# Allegro board TEST.brd
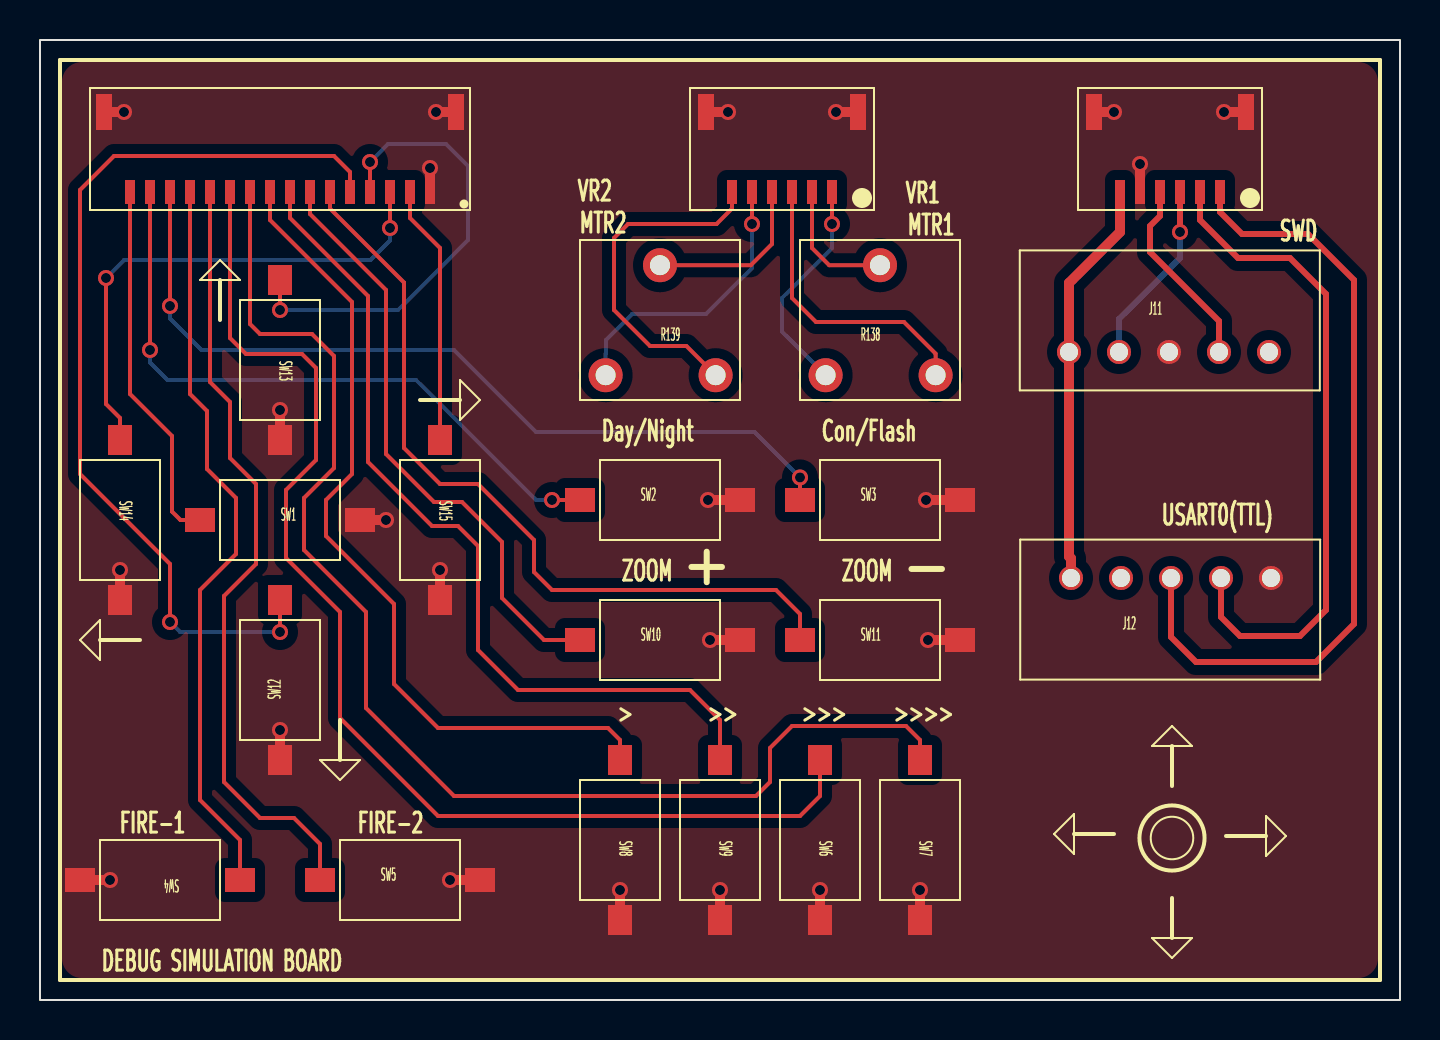
[diagram p0: board, top side]
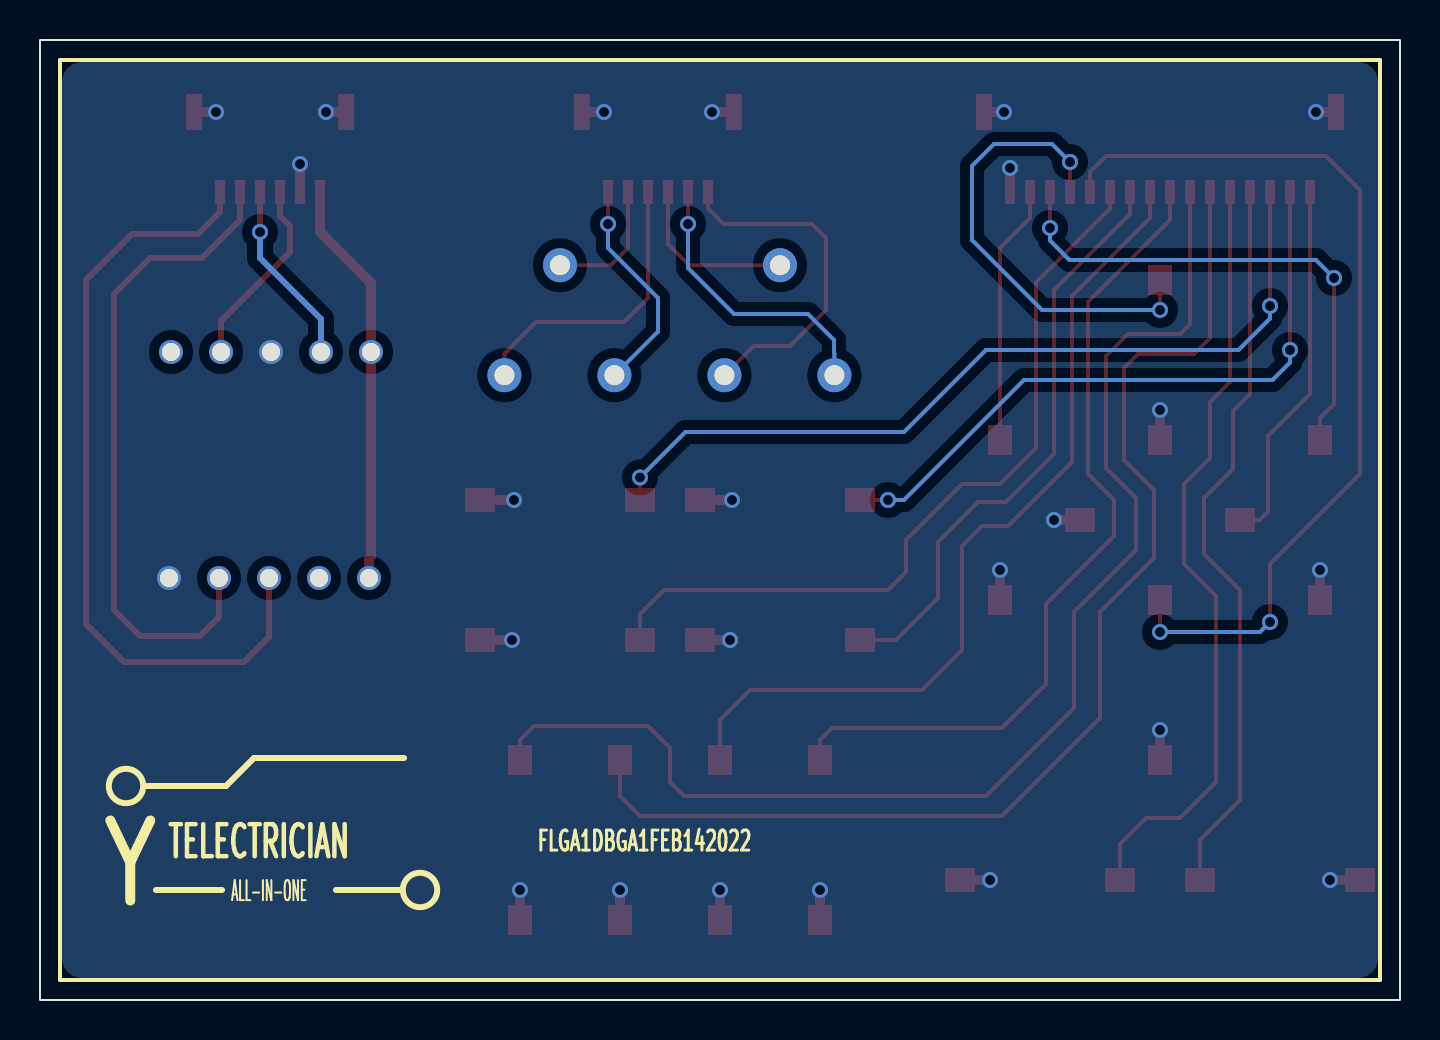
[diagram p1: board, bottom side, seen from below]

Outline 68 x 48 mm; copper layers: TOP, BOTTOM. Coordinates in mm from the lower left corner of the outline.
Outline path: rectangle 0,0 68,48

## Design rules (mm)
constraint set DEFAULT: min track width 0.127

## Placement (name value [footprint] x y rotation side)
J1  Header1x6  [SMD-SH1D0-6P-HOR]  37.1 41.1 180 top
J2  Header1x16  [SMD-SH1D0-16P-HOR]  12 41.1 180 top
J10  Header1x6  [SMD-SH1D0-6P-HOR]  56.5 41.1 180 top
J11  Header1x5  [XH2D54-5P-DEG90]  61.45 32.4 180 top
J12  Header1x5  [XH2D54-5P-DEG90]  51.55 21.1 0 top
NOREF  -  []  0 0 90 top
NOREF#2  -  []  0 48 0 top
R138  5K  [VR-BLUEWHITE]  42 34 0 top
R139  5K  [VR-BLUEWHITE]  31 34 0 top
SW1  Risym-SW  [RISYM-3X6X2D5]  12 24 0 top
SW2  Risym-SW  [RISYM-3X6X2D5]  31 25 0 top
SW3  Risym-SW  [RISYM-3X6X2D5]  42 25 0 top
SW4  Risym-SW  [RISYM-3X6X2D5]  6 6 180 top
SW5  Risym-SW  [RISYM-3X6X2D5]  18 6 0 top
SW6  Risym-SW  [RISYM-3X6X2D5]  39 8 270 top
SW7  Risym-SW  [RISYM-3X6X2D5]  44 8 270 top
SW8  Risym-SW  [RISYM-3X6X2D5]  29 8 270 top
SW9  Risym-SW  [RISYM-3X6X2D5]  34 8 270 top
SW10  Risym-SW  [RISYM-3X6X2D5]  31 18 0 top
SW11  Risym-SW  [RISYM-3X6X2D5]  42 18 0 top
SW12  Risym-SW  [RISYM-3X6X2D5]  12 16 270 top
SW13  Risym-SW  [RISYM-3X6X2D5]  12 32 270 top
SW14  Risym-SW  [RISYM-3X6X2D5]  4 24 270 top
SW15  Risym-SW  [RISYM-3X6X2D5]  20 24 270 top

## Library data of the parts
J1 J10 = Header1x6_0
J2 = Header1x16_0
J11 J12 = Header1x5_1
R138 R139 = RESISTOR VAR
SW1-SW15 = SW SPST

## Footprints (pads in the part's own frame, mm; a bottom-side part is the same pattern mirrored in y, then rotated)
RISYM-3X6X2D5
  rect 1.5x1.2 smd: 1(-4,0) 2(4,0)
SMD-SH1D0-6P-HOR
  rect 0.5x1.2 smd: 1(-2.5,0.7) 2(-1.5,0.7) 3(-0.5,0.7) 4(0.5,0.7) 5(1.5,0.7) 6(2.5,0.7)
  rect 0.8x1.8 smd: 7(3.8,-3.3) 8(-3.8,-3.3)
SMD-SH1D0-16P-HOR
  rect 0.5x1.2 smd: 1(-7.5,0.7) 2(-6.5,0.7) 3(-5.5,0.7) 4(-4.5,0.7) 5(-3.5,0.7) 6(-2.5,0.7) 7(-1.5,0.7) 8(-0.5,0.7) 9(0.5,0.7) 10(1.5,0.7) 11(2.5,0.7) 12(3.5,0.7) 13(4.5,0.7) 14(5.5,0.7) 15(6.5,0.7) 16(7.5,0.7)
  rect 0.8x1.8 smd: 17(8.8,-3.3) 18(-8.8,-3.3)
VR-BLUEWHITE
  round 1.7 hole 1: 1(-2.72,-2.76) 2(0,2.74) 3(2.78,-2.76)
XH2D54-5P-DEG90
  round 1.2 hole 0.9: 1(0,0) 2(2.5,0) 3(5,0) 4(7.5,0) 5(10,0)

## Nets
GND: J1.7 J1.8 J2.1 J2.17 J2.18 J10.5 J10.7 J10.8 J11.3 J12.5 SW1.2 SW2.2 SW3.2 SW4.2 SW5.2 SW6.2 SW7.2 SW8.2 SW9.2 SW10.2 SW11.2 SW12.2 SW13.2 SW14.2 SW15.2
VDD33: J10.6 J11.5 J12.1
IO_CON_FLASH: J2.14 SW3.1
IO_DAY_NIGHT: J2.15 SW2.1
IO_DOWN: J2.5 SW12.1
IO_FL_ADD: J2.7 SW10.1
IO_FL_SUB: J2.6 SW11.1
IO_LASER_MODE1: J2.9 SW8.1
IO_LASER_MODE2: J2.8 SW9.1
IO_LASER_MODE3: J2.11 SW6.1
IO_LASER_MODE4: J2.10 SW7.1
IO_LEFT: J2.3 SW14.1
IO_RIGHT: J2.2 SW15.1
IO_SET: J2.16 SW1.1
IO_SHOT_SW1: J2.13 SW4.1
IO_SHOT_SW2: J2.12 SW5.1
IO_UP: J2.4 SW13.1
IO_USART0_RX: J10.2 J12.4
IO_USART0_TX: J10.1 J12.3
SWCLK: J10.4 J11.2
SWDIO: J10.3 J11.4
N9516478: J1.1 R138.1
N9516552: J1.6 R139.3
N9524816: J1.5 R139.1
N9524820: J1.4 R139.2(WIPER)
N9524847: J1.3 R138.3
N9524854: J1.2 R138.2(WIPER)

Pads without a net: J11 1; J12 2

## Via types
v1: diameter 0.8, hole 0.5, TOP to BOTTOM, 36 vias

## Routing (per net, layer and track width the routed paths; a pad name or vN(x,y) marks a point on that pad's centre or on a via; arc(x,y) is an arc through that point)
GND: length 31.6
  TOP w0.5: SW2.2 v1(33.4,25) ; SW4.2 v1(3.5,6) ; J1.8 v1(39.8,44.4) ; SW15.2 v1(20,21.5) ; J2.17 v1(4.2,44.4) ; SW1.2 v1(17.3,24) ; J2.18 v1(19.8,44.4) ; J1.7 v1(34.4,44.4) ; SW5.2 v1(20.5,6) ; SW12.2 v1(12,13.5) ; SW10.2 v1(33.5,18) ; SW11.2 v1(44.4,18) ; SW14.2 v1(4,21.5) ; SW13.2 v1(12,29.5) ; J10.5 v1(55,41.8) ; SW6.2 v1(39,5.5) ; SW8.2 v1(29,5.5) ; SW7.2 v1(44,5.5) ; J10.8 v1(59.2,44.4) ; SW9.2 v1(34,5.5) ; J2.1 v1(19.5,41.6) ; J10.7 v1(53.7,44.4) ; SW3.2 v1(44.3,25)
VDD33: length 20.4
  TOP w0.5: J12.1 51.55,22.08 51.45,22.18 J11.5 51.45,35.85 54,38.4 J10.6
IO_CON_FLASH: length 42.2
  TOP w0.2: v1(38,26.13) SW3.1 ; J2.14 v1(6.5,34.7)
  BOTTOM w0.2: v1(6.5,34.7) 6.5,34.07 8.07,32.5 20.7,32.5 24.8,28.4 35.73,28.4 v1(38,26.13)
IO_DAY_NIGHT: length 32.9
  TOP w0.2: v1(5.5,32.5) J2.15 ; v1(25.6,25) SW2.1
  BOTTOM w0.2: v1(25.6,25) 24.8,25 18.8,31 6.37,31 5.5,31.87 v1(5.5,32.5)
IO_DOWN: length 46.3
  TOP w0.2: v1(6.5,18.9) 6.5,21.8 2,26.3 2,40.5 3.7,42.2 14.7,42.2 15.5,41.4 J2.5 ; SW12.1 v1(12,18.4)
  BOTTOM w0.2: v1(12,18.4) 7,18.4 v1(6.5,18.9)
IO_FL_ADD: length 29.9
  TOP w0.2: SW10.1 25.2,18 23.1,20.1 23.1,22.9 21.1,24.9 19.7,24.9 17.3,27.3 17.3,35.5 13.5,39.3 J2.7
IO_FL_SUB: length 39.8
  TOP w0.2: J2.6 14.5,39.57 18.2,35.87 18.2,27.6 20,25.8 21.9,25.8 24.7,23 24.7,21.4 25.6,20.5 36.8,20.5 38,19.3 SW11.1
IO_LASER_MODE1: length 41.7
  TOP w0.2: J2.9 11.5,39 15.6,34.9 15.6,26.3 14.3,25 14.3,23.2 17.7,19.8 17.7,15.8 19.9,13.6 28.4,13.6 29,13 SW8.1
IO_LASER_MODE2: length 43.1
  TOP w0.2: J2.8 12.5,39.1 16.4,35.2 16.4,26.9 19.6,23.7 20.9,23.7 21.9,22.7 21.9,17.5 23.9,15.5 32.5,15.5 34,14 SW9.1
IO_LASER_MODE3: length 59.7
  TOP w0.2: SW6.1 39,10.2 38,9.2 19.9,9.2 15,14.1 15,19.4 12.3,22.1 12.3,25.5 13.8,27 13.8,31.6 13.1,32.3 10.3,32.3 9.5,33.1 J2.11
IO_LASER_MODE4: length 64.2
  TOP w0.2: J2.10 10.5,33.8 11,33.3 13.6,33.3 14.7,32.2 14.7,26.6 13.2,25.1 13.2,22.5 16.3,19.4 16.3,14.6 20.7,10.2 35.8,10.2 36.5,10.9 36.5,12.6 37.6,13.7 43.3,13.7 44,13 SW7.1
IO_LEFT: length 25.8
  TOP w0.2: v1(3.3,36.1) 3.3,29.8 4,29.1 SW14.1 ; v1(17.5,38.6) J2.3
  BOTTOM w0.2: v1(3.3,36.1) 4.2,37 16.53,37 17.5,37.97 v1(17.5,38.6)
IO_RIGHT: length 13
  TOP w0.2: SW15.1 20,37.6 18.5,39.1 J2.2
IO_SET: length 18.4
  TOP w0.2: J2.16 4.5,30.3 6.6,28.2 6.6,24.42 7.02,24 SW1.1
IO_SHOT_SW1: length 36.9
  TOP w0.2: J2.13 7.5,30.3 8.35,29.45 8.35,26.55 9.8,25.1 9.8,22.3 8,20.5 8,10 10,8 SW4.1
IO_SHOT_SW2: length 39
  TOP w0.2: SW5.1 14,7.8 12.7,9.1 11,9.1 9.2,10.9 9.2,20.2 10.8,21.8 10.8,25.8 9.5,27.1 9.5,29.9 8.5,30.9 J2.12
IO_UP: length 23.3
  TOP w0.2: SW13.1 v1(12,34.5) ; v1(16.5,41.9) J2.4
  BOTTOM w0.2: v1(12,34.5) 17.9,34.5 21.4,38 21.4,41.7 20.3,42.8 17.4,42.8 v1(16.5,41.9)
IO_USART0_RX: length 33.2
  TOP w0.3: J12.4 59.05,19.15 60,18.2 63,18.2 64.3,19.5 64.3,35.3 62.5,37.1 59.9,37.1 58,39 J10.2
IO_USART0_TX: length 39.7
  TOP w0.3: J12.3 56.55,18.15 57.8,16.9 63.8,16.9 65.7,18.8 65.7,36 63.4,38.3 60.1,38.3 59,39.4 J10.1
SWCLK: length 9.6
  TOP w0.3: J11.2 58.95,33.95 55.5,37.4 55.5,38.7 56,39.2 J10.4
SWDIO: length 9.3
  TOP w0.3: J10.3 v1(57,38.4)
  BOTTOM w0.3: J11.4 53.95,34.05 57,37.1 v1(57,38.4)
N9516478: length 11.1
  TOP w0.2: J1.1 v1(39.6,38.8)
  BOTTOM w0.2: v1(39.6,38.8) 39.6,37.6 37.1,35.1 37.1,33.42 R138.1
N9516552: length 17.4
  TOP w0.2: J1.6 34.6,39.57 33.83,38.8 29.4,38.8 28.7,38.1 28.7,34.5 30.5,32.7 32.32,32.7 R139.3
N9524816: length 14.4
  TOP w0.2: J1.5 v1(35.6,38.8)
  BOTTOM w0.2: R139.1 28.28,32.32 28.3,32.34 28.3,33 29.6,34.3 33.3,34.3 35.6,36.6 v1(35.6,38.8)
N9524820: length 8.6
  TOP w0.2: R139.2 35.54,36.74 36.6,37.8 J1.4
N9524847: length 14.7
  TOP w0.2: R138.3 44.78,32.32 43.2,33.9 38.8,33.9 37.6,35.1 J1.3
N9524854: length 6.6
  TOP w0.2: J1.2 38.6,37.6 39.46,36.74 R138.2

## Copper pours and planes (outline as drawn; the poured copper is in the pictures)
GND on TOP: 1.1,2.1 1.39,1.39 2.1,1.1 65.9,1.1 66.61,1.39 66.9,2.1 66.9,45.9 66.61,46.61 65.9,46.9 2.1,46.9 1.39,46.61 1.1,45.9 ; 10 cut-outs
GND on BOTTOM: 1.1,2.1 1.39,1.39 2.1,1.1 65.9,1.1 66.61,1.39 66.9,2.1 66.9,45.9 66.61,46.61 65.9,46.9 2.1,46.9 1.39,46.61 1.1,45.9

## Text on the board
Ref Des/Silkscreen Bottom: ALL-IN-ONE | FLGA1DBGA1FEB142022 | TELECTRICIAN | Y
Ref Des/Silkscreen Top: DEBUG SIMULATION BOARD | FIRE-1 | FIRE-2 | VR2 | MTR2 | Day/Night | > | ZOOM | >> | >>> | Con/Flash | >>>> | VR1 | MTR1 | USART0(TTL) | SWD | + | -
DIMENSION: IN GOD WE TRUST, NO BUGS PERMANENTLY. | ANY QUESTIONS PLEASE CALL +8613522296239 (Mr.YANTAI ELECTRICIAN) | FIGURE | FINISHED_SIZE | 0.5 | 0.9 | 1.0 | DRILL CHART: TOP to BOTTOM | ALL UNITS ARE IN MILLIMETERS | PLATED | QTY | 36 | 10 | 6 | 52 | TOTAL HOLES:
XSECTION_CHART: *  SURFACE | L1 TOP CONDUCTOR | *  DIELECTRIC | L2 BOTTOM CONDUCTOR | DESIGN CROSS SECTION CHART | ___________________________ | 1-2
